# EAGLE board arduinoboardwithphotoresistors2 (EAGLE 8.3.2)
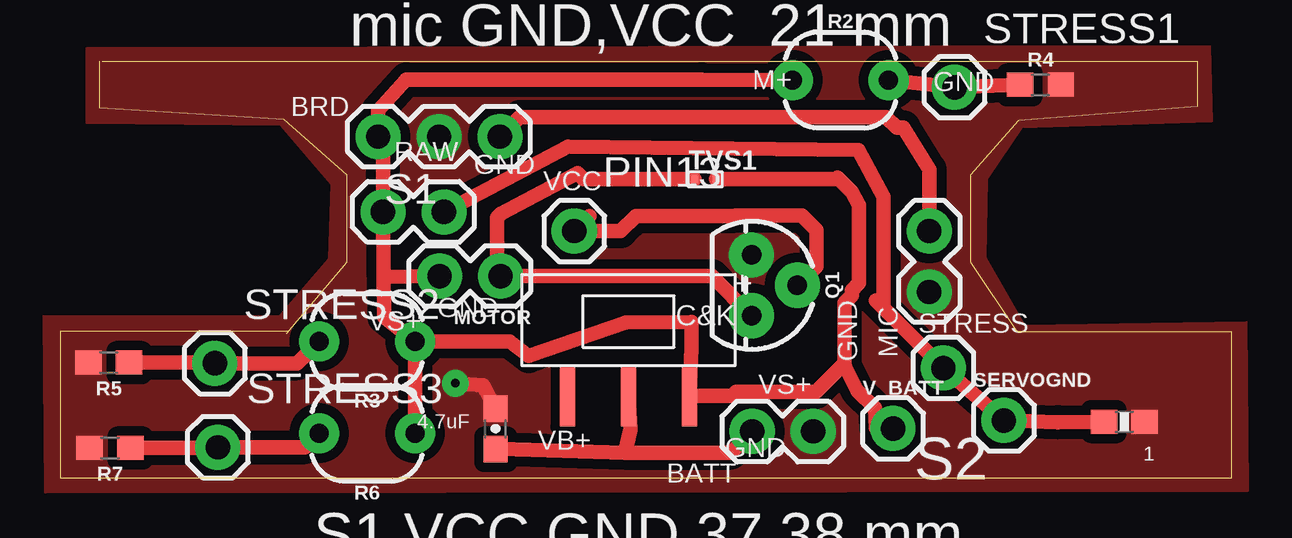
[diagram p0: board, top side]
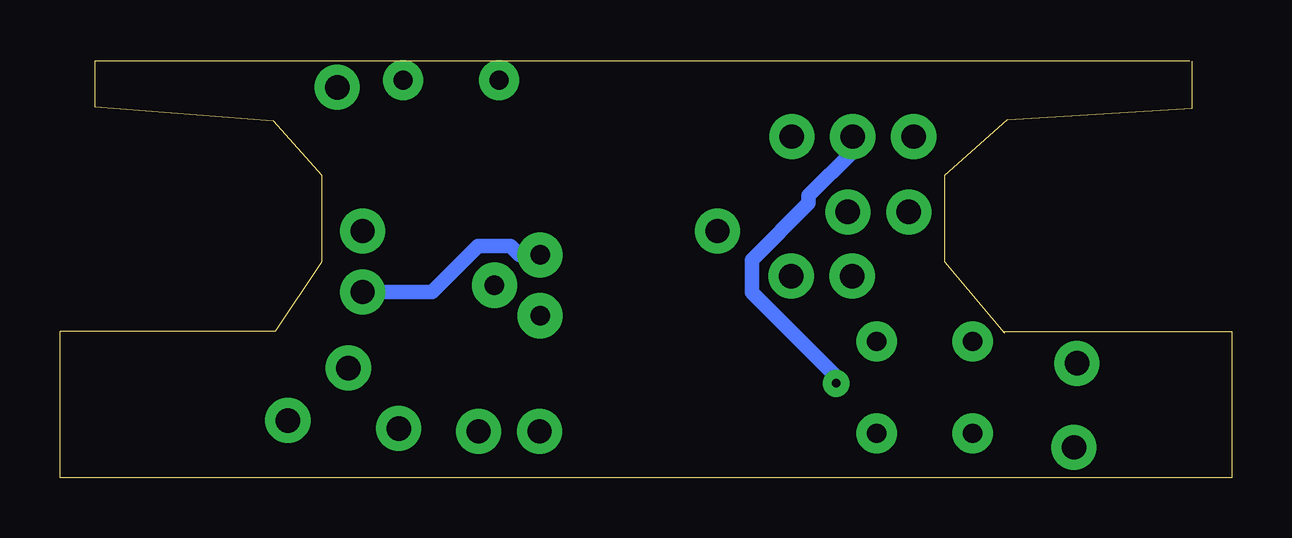
[diagram p1: board, bottom side, seen from below]

Size 48.84 x 17.37 mm. Coordinates in mm from the lower left corner, seen from the top.
Outline: 1.75,17.37 47.4,17.37 47.4,15.47 39.95,14.88 37.95,12.62 37.95,8.99 39.88,6.1 48.84,6.1 48.84,0 0,0 0,6.1 9.52,6.1
Outline: 9.45,6.02 11.96,8.99 11.96,12.62 9.35,14.94 1.65,15.42 1.65,17.37
Copper layers (1*16): Top 0.035mm / dielectric 1.5mm / Bottom 0.035mm
Design rules "OthermillDRC_1_64_v2": minimum track width 16mil, minimum drill 31mil, track to track 0.39878125mm, track to pad 0.39878125mm, pad to pad 0.39878125mm, via to via 0.39878125mm, smd to smd 0mil, copper to edge 0mil, drill to drill 1mil, minimum pad ring 0mil, minimum via ring 15mil, stop-mask expansion 1mil, vias tented up to drill 30mil, thermal gap 10mil

## Footprints (pad centres in the part's own frame; a part is rotated, then mirrored left to right if it is on the bottom)
1X02 = drill 1.016 pad 1.88: 1 0,0; 2 2.54,0
1X03 = drill 1.016 pad 1.88: 1 0,0; 2 2.54,0; 3 5.08,0
0603-CAP = smd 1.1 x 1: 1 -0.85,0; 2 0.85,0
1X01 = drill 1.016 pad 1.88: 1 0,0
TO-92 = drill 0.813 pad 1.88: 1 -1.27,0; 2 0,1.905; 3 1.27,0
0603-RES = smd 1.1 x 1: 1 -0.85,0; 2 0.85,0
PHOTOCELL = drill 0.8 pad 1.676: 1 -2,0; 2 2,0
0603 = smd 1.1 x 1: 1 -0.85,0; 2 0.85,0
SOD-923 = smd 0.3 x 0.4: P$1 -0.45,0; P$2 0.45,0
WILL-BLACKSLIDESWITCH = smd 2.54 x 0.635: CONN 5.08,6.985; NC 5.08,1.905; V+ 5.08,4.445

## Placement (x,y rotation side)
BATT  [1X02]  28.85,1.93 0 top
BRD  [1X03]  18.34,14.23 180 top
C2  4.7uF  [0603-CAP]  18.16,2.04 90 top
MIC  [1X02]  36.23,10.29 270 top
MOTOR  [1X02]  18.36,8.41 180 top
PIN13  DIGITALPIN  [1X01]  21.44,10.29 0 top
Q1  200mA/40V  [TO-92]  28.83,8.03 270 top
R1  1  [0603-RES]  44.36,2.34 180 top
R2  PHOTOCELLPTH  [PHOTOCELL]  32.54,16.59 0 top
R3  PHOTOCELLPTH  [PHOTOCELL]  12.8,5.69 180 top
R4  10k  [0603]  40.87,16.38 0 top
R5  10k  [0603]  2.03,4.8 180 top
R6  PHOTOCELLPTH  [PHOTOCELL]  12.8,1.85 180 top
R7  10k  [0603]  2.08,1.24 180 top
S1  S1  [1X02]  16,11.08 180 top
SERVOGND  [1X01]  39.34,2.39 0 top
STRESS  [1X01]  36.82,4.58 0 top
STRESS1  [1X01]  37.29,16.28 0 top
STRESS2  [1X01]  6.45,4.78 0 top
STRESS3  [1X01]  6.58,1.27 0 top
TVS1  [SOD-923]  26.9,12.45 0 top
U$1  WILL-BLACKSLIDESWITCH  [WILL-BLACKSLIDESWITCH]  19.25,8.48 270 top
V_BATT  [1X01]  34.72,2.06 0 top

## Library data of the parts
BATT BRD MIC MOTOR PIN13 S1 SERVOGND STRESS STRESS1-STRESS3 V_BATT = SparkFun-Connectors
C2 = SparkFun-Capacitors; PROD_ID: CAP-08280
Q1 = SparkFun-DiscreteSemi; PROD_ID: TRANS-08447
R1 = SparkFun-Resistors; PROD_ID: RES-08296
R2 R3 R6 = SparkFun-Sensors; PROD_ID: COMP-09129; SF_ID: SEN-09088
R4 R5 R7 = SparkFun-Resistors; PROD_ID: RES-00824
TVS1 = PP_Passives
U$1 = Will-Switch

## Nets
GND: BATT.2 BRD.2 C2.2 MIC.2 Q1.1 R1.1 R4.2 R5.2 R7.2
N$2: R2.2 R4.1 STRESS1.1
N$3: R3.2 R5.1 STRESS2.1
N$4: R6.2 R7.1 STRESS3.1
N$5: PIN13.1 Q1.2
N$6: MOTOR.1 Q1.3 TVS1.P$1
SERVOGND: R1.2 S1.1 SERVOGND.1 STRESS.1
SWITCH+: BATT.1 C2.1 U$1.V+
V_BATT: BRD.3 MOTOR.2 R2.1 R3.1 R6.1 S1.2 TVS1.P$2 U$1.CONN V_BATT.1
VCC: BRD.1 MIC.1

## Tracks (layer width: path | path; a pad name or v marks a point on that pad's centre or on a via)
GND  (via drill 0.35)
  Top 0.61: C2.2 17.63,3.86 v16.48,3.94
  Bottom 0.61: 16.48,3.79 v16.48,3.94 16.48,4.2 20.01,7.73 20.01,9.09 17.65,11.45 17.65,11.76 15.8,13.61 BRD.2 | 16.48,3.79 16.48,3.66 16.54,3.66 16.54,3.79 16.48,3.79 | MIC.2 33.34,7.75 31.41,9.67 30.05,9.67 29.68,9.3 Q1.1
  pour Top (rank 6, no thermals): 1.12,17.93 47.93,18.01 48.01,14.86 40.08,14.61 38.63,12.47 38.58,9.19 40.21,6.35 49.45,6.5 49.5,-0.56 -0.61,-0.64 -0.69,6.76 9.17,6.76 11.23,9.12 11.33,12.24 9.22,14.71 1.12,14.78
N$2
  Top 0.61: R4.1 STRESS1.1 R2.2
N$3
  Top 0.61: R5.1 6.43,4.8 STRESS2.1 9.89,4.78 R3.2
N$4
  Top 0.61: R7.1 6.55,1.25 STRESS3.1 10.22,1.27 R6.2
N$5
  Top 0.61: 22.07,10.92 PIN13.1 23.37,10.29 24,10.92 28.13,10.92 28.15,10.94 30.92,10.94 31.52,10.34 31.52,8.81 Q1.2
N$6
  Top 0.61: Q1.3 27.18,8.41 MOTOR.1 18.53,8.4 18.21,8.72 18.21,10.85 18.39,11.02 21.56,12.7 21.82,12.45 TVS1.P$1
SERVOGND
  Top 0.61: STRESS.1 SERVOGND.1 41.6,2.31 R1.2 | S1.1 21.18,13.82 33.27,13.66 34.32,11.73 34.32,7.21 34.25,7.15 | 36.72,4.47 STRESS.1 | 34.25,7.15 34.01,7.39 | 34.25,7.15 STRESS.1
SWITCH+
  Top 0.61: 23.55,1.04 18.32,1.2 C2.1 | U$1.V+ 23.77,2.01 23.55,1.04 | 23.55,1.04 27.96,1.04 BATT.1
V_BATT
  Top 0.61: R2.1 26.75,16.61 14.43,16.61 13.26,15.32 BRD.3 13.46,14.33 S1.2 13.5,8.38 | 13.5,8.38 13.51,6.7 R3.1 | R3.1 R6.1 | R3.1 18.74,5.69 19.53,5.08 23.59,6.48 26.31,6.5 26.31,5.41 U$1.CONN 28,3.4 28.17,3.58 31.5,3.58 32.53,4.6 | V_BATT.1 34.01,2.08 33.96,2.92 33.25,3.63 32.74,4.6 32.53,4.6 | MOTOR.2 13.5,8.38 | 32.53,4.6 32.69,4.76 32.69,7.29 33,7.6 33,7.81 33.31,8.11 33.31,11.38 33.02,11.91 32.41,12.52 32.33,12.45 TVS1.P$2
VCC
  Top 0.61: MIC.1 36.25,10.3 36.25,12.85 35.16,14.6 34.88,14.6 34.43,15.04 19.16,15.04 BRD.1

## Text on the board
tPlace: RAW,GND,VCC 26 mm | battery 45 mm | stress 28 mm A7 | mic 16 mm A6 | mic GND,VCC 21 mm | M+ | GND | RAW | GND | VCC | + | GND | VS+ | GND | VS+ | VB+ | GND | S2 | S1 VCC,GND 37,38 mm | S2 VCC,GND 37,38 mm | S1 SIG,48 mm D5 | S1 SIG,52 mm D6